# Altium PCB PET2001N_Keyboard.PcbDoc
Units mm, origin at the board's own origin, x right, y up, seen from the top; angles counter-clockwise.
Board outline 385.62 x 132.15 mm, 2 copper layers (Top Layer, Bottom Layer), stack 1.57 mm thick; 73 components, 18 nets, 184 pads, 0 vias.
Unrouted connection lines stored in the file: 148.
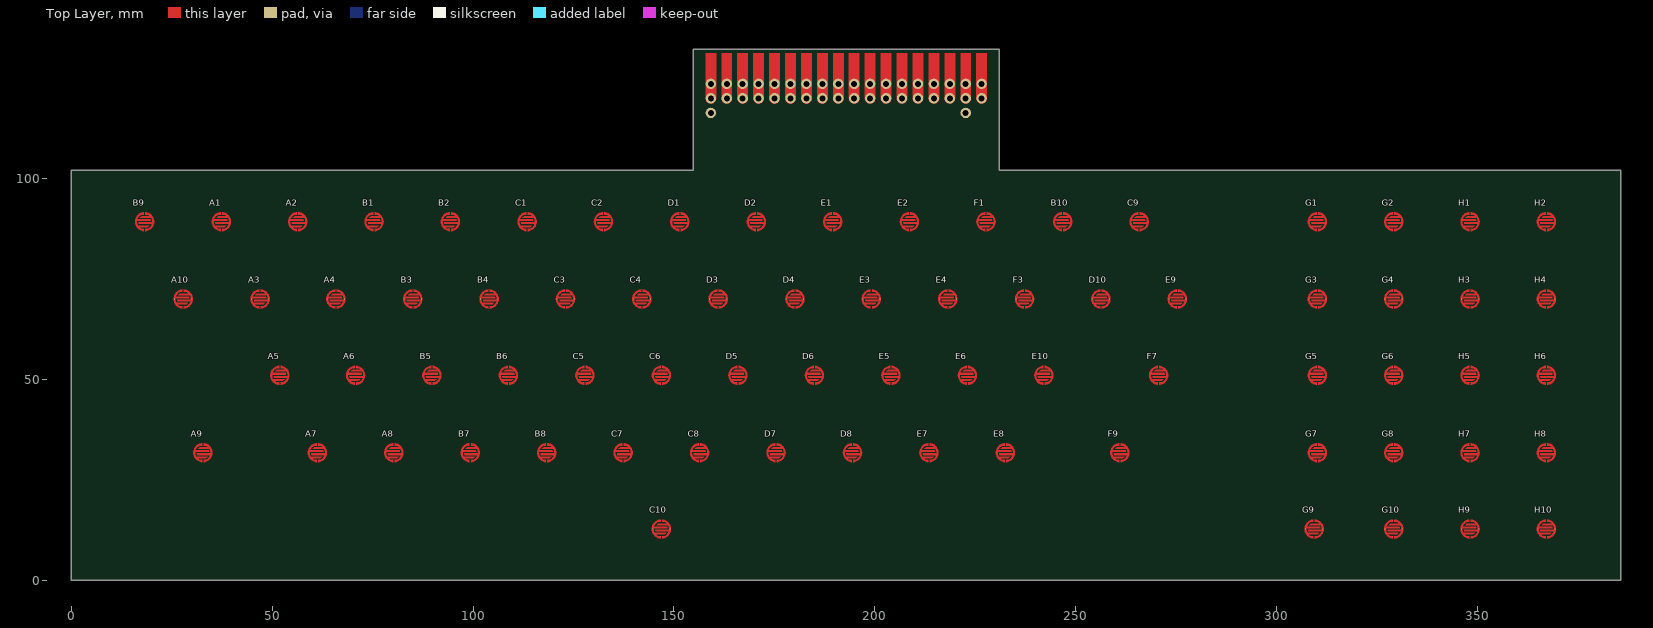
[diagram p0: Top Layer view]
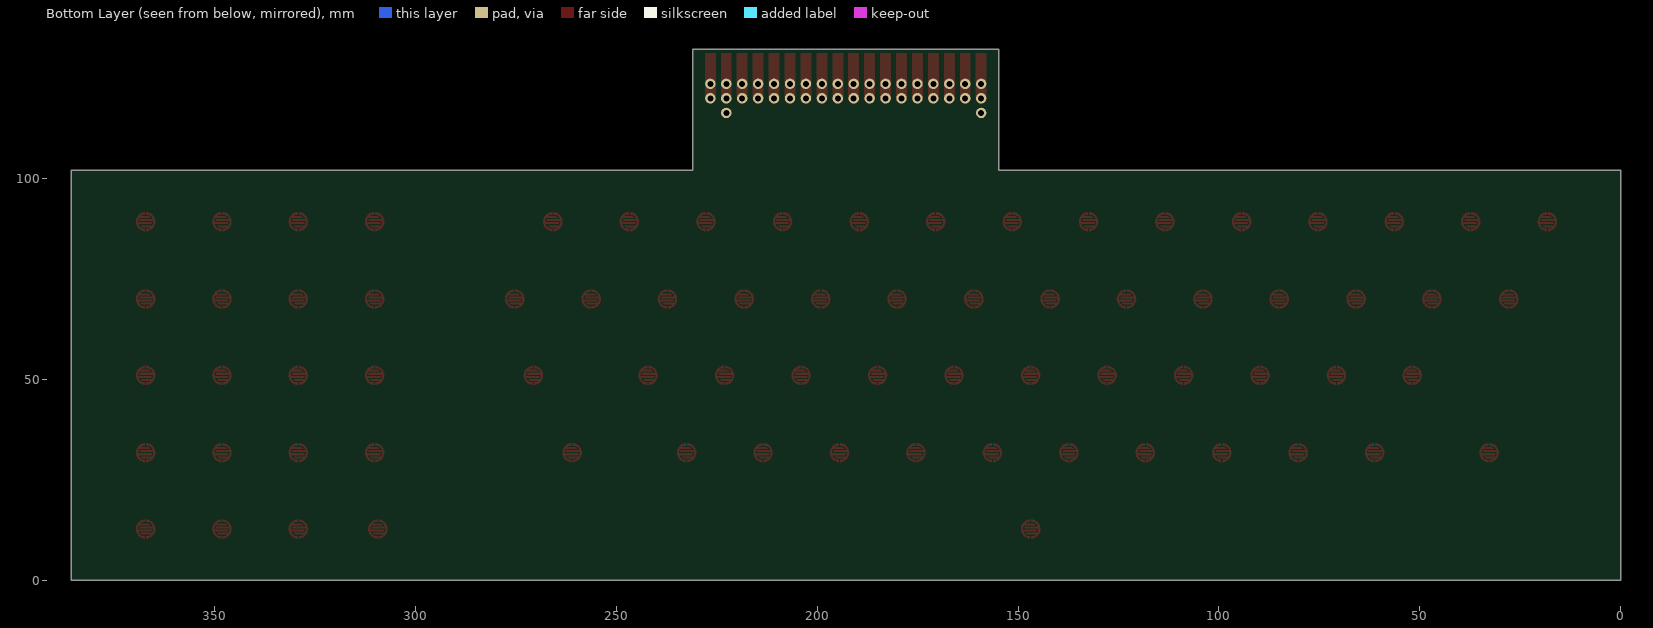
[diagram p1: Bottom Layer view, seen from below]

## Layer stack, top to bottom
Top Solder: solder mask 0.0127, Solder Resist, Dk 3.8
Top Layer: signal copper 0.035
Dielectric: core 1.5, FR-4, Dk 4.5
Bottom Layer: signal copper 0.035
Bottom Solder: solder mask 0.0127, Solder Resist, Dk 3.8

## Board outline
0,0 0,102 154.75,102 154.75,132.15 231,132.15 231,102 385.625,102 385.625,0

## Design rules (kind name [scope] priority, off if disabled: settings)
BoardOutlineClearance [All] p1: gap=0.2 ignorepadtopadclearanceinfootprint=FALSE
Clearance [All] p1: gap=0.127 ignorepadtopadclearanceinfootprint=FALSE except(0.25: Arc-Hole Track-Hole SMDPad-Hole THPad-Hole Via-Hole Fill-Hole Poly-Hole Region-Hole Text-Hole)
ComponentClearance [All] p1: gap=0.127 collisioncheckmode=3 verticalgap=0.127 showdistances=TRUE
DiffPairsRouting [All] p1: maxlimit=0.254 minlimit=0.127 mostfreqgap=0.127 toplayer_minwidth=0.127 toplayer_maxwidth=25.4 toplayer_prefwidth=0.127 bottomlayer_minwidth=0.127 bottomlayer_maxwidth=25.4 bottomlayer_prefwidth=0.127 maxuncoupledlength=12.7
Height [All] p1: minheight=0 maxheight=1816.048 prefheight=12.7
HoleSize [All] p1: absolutevalues=TRUE maxlimit=6.3 minlimit=0.3 maxpercent=80.000 minpercent=20.000
HoleToHoleClearance [All] p1: gap=0.25 allowstackedmicrovias=FALSE
MinimumAnnularRing [All] p1: minimumring=0.076
MinimumSolderMaskSliver [All] p1: minsoldermaskwidth=0
PlaneClearance [All] p1: clearance=0.127
PlaneConnect PlaneConnectPowerPads [InPadClass('PowerPads')] p1: planeconnectstyle=Direct reliefexpansion=0.508 reliefentries=4 reliefconductorwidth=0.254 reliefairgap=0.254
PlaneConnect [All] p2: pad.planeconnectstyle=Relief pad.reliefexpansion=0.3 pad.reliefentries=4 pad.reliefconductorwidth=0.127 pad.reliefairgap=0.127 via.planeconnectstyle=Direct via.reliefexpansion=0.3 via.reliefentries=4 via.reliefconductorwidth=0.127 via.reliefairgap=0.127
PolygonConnect PolygonConnectPowerPads [All vs (InPadClass('PowerPads'))] p1: connectstyle=Direct reliefconductorwidth=0.254 reliefentries=4 polygonreliefangle="90 Angle" airgapwidth=0.254
PolygonConnect [All] p2: thpad.connectstyle=Relief thpad.reliefconductorwidth=0.127 thpad.reliefentries=4 thpad.polygonreliefangle="90 Angle" thpad.airgapwidth=0.127 smdpad.connectstyle=Relief smdpad.reliefconductorwidth=0.127 smdpad.reliefentries=4 smdpad.polygonreliefangle="90 Angle" smdpad.airgapwidth=0.127 via.connectstyle=Direct via.reliefconductorwidth=0.127 via.reliefentries=4 via.polygonreliefangle="90 Angle" via.airgapwidth=0.127
RoutingVias [All] p1: holewidth=0.3 width=0.6 viastyle="Through Hole" minholewidth=0.3 minwidth=0.6 maxholewidth=0.6 maxwidth=6.6
SilkToSilkClearance [All] p1: silktosilkclearance=0
SilkToSolderMaskClearance [IsPad] p1: minsilkscreentomaskgap=0.127 clearancetoexposedcopper=TRUE
SolderMaskExpansion [All] p1: expansion=0.075 istentingtop=FALSE
Width [All] p1: maxlimit=25.4 minlimit=0.127 preferedwidth=0.127 minimp=50.000000 maximp=50.000000 favimp=50.000000
20 further rules are at their usual default settings.

## Components (designator, comment, footprint, x,y, rotation, side; value= is the part's Value field where it differs from the comment)
A1 "!" PET2001NKeyboardSoftButton 37.35,89.25 r0 top locked
A2 "\"" PET2001NKeyboardSoftButton 56.35,89.25 r0 top locked
A3 "Q" PET2001NKeyboardSoftButton 47,70 r0 top locked
A4 "W" PET2001NKeyboardSoftButton 65.85,70 r0 top locked
A5 "A" PET2001NKeyboardSoftButton 51.9,51 r0 top locked
A6 "S" PET2001NKeyboardSoftButton 70.75,51 r0 top
A7 "Z" PET2001NKeyboardSoftButton 61.25,31.75 r0 top
A8 "X" PET2001NKeyboardSoftButton 80.275,31.75 r0 top
A9 "SHIFTL" PET2001NKeyboardSoftButton 32.75,31.75 r0 top locked
A10 "OFF RVS" PET2001NKeyboardSoftButton 27.85,70 r0 top locked
B1 "#" PET2001NKeyboardSoftButton 75.35,89.25 r0 top locked
B2 "$" PET2001NKeyboardSoftButton 94.35,89.25 r0 top locked
B3 "E" PET2001NKeyboardSoftButton 85,70 r0 top
B4 "R" PET2001NKeyboardSoftButton 104,70 r0 top
B5 "D" PET2001NKeyboardSoftButton 89.75,51 r0 top
B6 "F" PET2001NKeyboardSoftButton 108.791,51 r0 top
B7 "C" PET2001NKeyboardSoftButton 99.3,31.75 r0 top
B8 "V" PET2001NKeyboardSoftButton 118.325,31.75 r0 top
B9 "@" PET2001NKeyboardSoftButton 18.25,89.25 r0 top locked
B10 "[" PET2001NKeyboardSoftButton 246.75,89.25 r0 top locked
C1 "%" PET2001NKeyboardSoftButton 113.45,89.25 r0 top locked
C2 "'" PET2001NKeyboardSoftButton 132.45,89.25 r0 top locked
C3 "T" PET2001NKeyboardSoftButton 123,70 r0 top
C4 "Y" PET2001NKeyboardSoftButton 142,70 r0 top
C5 "G" PET2001NKeyboardSoftButton 127.831,51 r0 top
C6 "H" PET2001NKeyboardSoftButton 146.872,51 r0 top
C7 "B" PET2001NKeyboardSoftButton 137.35,31.75 r0 top
C8 "N" PET2001NKeyboardSoftButton 156.375,31.75 r0 top
C9 "]" PET2001NKeyboardSoftButton 265.775,89.25 r0 top locked
C10 "SPACE" PET2001NKeyboardSoftButton 146.85,12.75 r0 top locked
D1 "&" PET2001NKeyboardSoftButton 151.45,89.25 r0 top locked
D2 "\" PET2001NKeyboardSoftButton 170.5,89.25 r0 top locked
D3 "U" PET2001NKeyboardSoftButton 161,70 r0 top
D4 "I" PET2001NKeyboardSoftButton 180.1,70 r0 top
D5 "J" PET2001NKeyboardSoftButton 165.913,51 r0 top
D6 "K" PET2001NKeyboardSoftButton 184.953,51 r0 top
D7 "M" PET2001NKeyboardSoftButton 175.4,31.75 r0 top
D8 "," PET2001NKeyboardSoftButton 194.425,31.75 r0 top
D10 "<" PET2001NKeyboardSoftButton 256.25,70 r0 top
E1 "(" PET2001NKeyboardSoftButton 189.5,89.25 r0 top locked
E2 ")" PET2001NKeyboardSoftButton 208.6,89.25 r0 top locked
E3 "O" PET2001NKeyboardSoftButton 199.1,70 r0 top
E4 "P" PET2001NKeyboardSoftButton 218.15,70 r0 top
E5 "L" PET2001NKeyboardSoftButton 203.994,51 r0 top
E6 ":" PET2001NKeyboardSoftButton 223.034,51 r0 top
E7 ";" PET2001NKeyboardSoftButton 213.45,31.75 r0 top
E8 "?" PET2001NKeyboardSoftButton 232.475,31.75 r0 top
E9 ">" PET2001NKeyboardSoftButton 275.275,70 r0 top
E10 "RUN STOP" PET2001NKeyboardSoftButton 242.075,51 r0 top
F1 "<-" PET2001NKeyboardSoftButton 227.65,89.25 r0 top locked
F3 "/\" PET2001NKeyboardSoftButton 237.25,70 r0 top
F7 "RETURN" PET2001NKeyboardSoftButton 270.625,51 r0 top
F9 "SHIFTR" PET2001NKeyboardSoftButton 260.975,31.75 r0 top
G1 "CLR HOME" PET2001NKeyboardSoftButton 310.125,89.25 r0 top locked
G2 "CRSR /\ \/" PET2001NKeyboardSoftButton 329.125,89.25 r0 top locked
G3 "7" PET2001NKeyboardSoftButton 310.125,70 r0 top locked
G4 "8" PET2001NKeyboardSoftButton 329.125,70 r0 top locked
G5 "4" PET2001NKeyboardSoftButton 310.125,51 r0 top locked
G6 "5" PET2001NKeyboardSoftButton 329.125,51 r0 top locked
G7 "1" PET2001NKeyboardSoftButton 310.125,31.75 r0 top locked
G8 "2" PET2001NKeyboardSoftButton 329.125,31.75 r0 top locked
G9 "0" PET2001NKeyboardSoftButton 309.325,12.75 r0 top locked
G10 "." PET2001NKeyboardSoftButton 329.125,12.75 r0 top locked
H1 "CRSR <>" PET2001NKeyboardSoftButton 348.125,89.25 r0 top locked
H2 "INST DEL" PET2001NKeyboardSoftButton 367.125,89.25 r0 top locked
H3 "9" PET2001NKeyboardSoftButton 348.125,70 r0 top locked
H4 "/" PET2001NKeyboardSoftButton 367.125,70 r0 top locked
H5 "6" PET2001NKeyboardSoftButton 348.125,51 r0 top locked
H6 "*" PET2001NKeyboardSoftButton 367.125,51 r0 top locked
H7 "3" PET2001NKeyboardSoftButton 348.125,31.75 r0 top locked
H8 "+" PET2001NKeyboardSoftButton 367.125,31.75 r0 top locked
H9 "-" PET2001NKeyboardSoftButton 348.125,12.75 r0 top locked
H10 "" PET2001NKeyboardSoftButton 367.125,12.75 r0 top locked

## Footprints (in the part's own frame and the unit in brackets; to place one, negate y for a bottom-side part, rotate by r counter-clockwise, add the part's x,y. Pads: shape width x height; smd on the part's side, far side on the other; paste and mask are expansions set on the pad)
PET2001NKeyboardSoftButton [mm]
  round 0.1 smd: 1(-2.15,0) 2(2.15,0)
  Top Layer region: -1.425,-0.583 -1.489,-0.392 -1.527,-0.194 -1.527,-0.194 1.915,-0.194 1.881,0.409 1.662,0.972 1.662,0.972 -1.194,0.972 -0.977,1.191 -0.72,1.361 -0.72,1.361 1.361,1.361 1.099,1.581 0.802,1.75 0.802,1.75 0.193,1.75 0.193,2.367 1.297,1.99 2.088,1.131 2.375,0 2.088,-1.131 1.297,-1.99 0.193,-2.367 0.193,-2.367 0.193,-1.75 0.802,-1.75 1.442,-1.276 1.835,-0.583 1.835,-0.583
  Top Layer region: 1.425,0.583 1.489,0.392 1.527,0.194 1.527,0.194 -1.915,0.194 -1.881,-0.409 -1.662,-0.972 -1.662,-0.972 1.194,-0.972 0.977,-1.191 0.72,-1.361 0.72,-1.361 -1.361,-1.361 -1.099,-1.581 -0.802,-1.75 -0.802,-1.75 -0.193,-1.75 -0.193,-2.367 -1.297,-1.99 -2.088,-1.131 -2.375,0 -2.088,1.131 -1.297,1.99 -0.193,2.367 -0.193,2.367 -0.193,1.75 -0.802,1.75 -1.442,1.276 -1.835,0.583 -1.835,0.583

## Part data
A1 A2 A3 A4 A5 A6 A7 A8 A9 A10 B1 B2 B3 B4 B5 B6 B7 B8 B9 B10 C1 C2 C3 C4 C5 C6 C7 C8 C9 C10 D1 D2 D3 D4 D5 D6 D7 D8 D10 E1 E2 E3 E4 E5 E6 E7 E8 E9 E10 F1 F3 F7 F9 G1 G2 G3 G4 G5 G6 G7 G8 G9 G10 H1 H2 H3 H4 H5 H6 H7 H8 H9 H10: library part PET2001NKeyboardSoftButton

## Free pads (board coordinates)
  round 2.6 hole 1.5: 4(159.175,119.951) 4(163.139,119.951) 4(167.104,119.951) 4(171.069,119.951) 4(175.034,119.951) 4(178.998,119.951) 4(182.963,119.951) 4(186.928,119.951) 4(190.892,119.951) 4(194.857,119.951) 4(198.822,119.951) 4(202.787,119.951) 4(206.751,119.951) 4(210.716,119.951) 4(214.681,119.951) 4(218.645,119.951) 4(222.61,119.951) 4(226.575,119.951) 5(159.175,123.551) 5(163.139,123.551) 5(167.104,123.551) 5(171.069,123.551) 5(175.034,123.551) 5(178.998,123.551) 5(182.963,123.551) 5(186.928,123.551) 5(190.892,123.551) 5(194.857,123.551) 5(198.822,123.551) 5(202.787,123.551) 5(206.751,123.551) 5(210.716,123.551) 5(214.681,123.551) 5(218.645,123.551) 5(222.61,123.551) 5(226.575,123.551)
  round 2.6 hole 1.5 mask+1: 4(159.175,116.3) 4(222.61,116.3)

## Nets (pads, with @x,y where several pads share a name; then routed paths per layer and width w, separated by ;. In a path a pad name is that pad's centre, name@x,y a point inside that pad or via, vN(x,y) a via of type N, cw(c..) or ccw(c..) an arc to the next point about the centre after c; other vN are vias at no path point)
1: A1.2 B1.2 C1.2 D1.2 E1.2 F1.2 G1.2 H1.2 pad.4@190.892,119.951 pad.5@190.892,123.551
2: A2.2 B2.2 C2.2 D2.2 E2.2 G2.2 H2.2 pad.4@194.857,119.951 pad.5@194.857,123.551
3: A3.2 B3.2 C3.2 D3.2 E3.2 F3.2 G3.2 H3.2 pad.4@198.822,119.951 pad.5@198.822,123.551
4: A4.2 B4.2 C4.2 D4.2 E4.2 G4.2 H4.2 pad.4@202.787,119.951 pad.5@202.787,123.551
5: A5.2 B5.2 C5.2 D5.2 E5.2 G5.2 H5.2 pad.4@206.751,119.951 pad.5@206.751,123.551
6: A6.2 B6.2 C6.2 D6.2 E6.2 G6.2 H6.2 pad.4@210.716,119.951 pad.5@210.716,123.551
7: A7.2 B7.2 C7.2 D7.2 E7.2 F7.2 G7.2 H7.2 pad.4@214.681,119.951 pad.5@214.681,123.551
8: A8.2 B8.2 C8.2 D8.2 E8.2 G8.2 H8.2 pad.4@218.645,119.951 pad.5@218.645,123.551
9: A9.2 B9.2 C9.2 E9.2 F9.2 G9.2 H9.2 pad.4@222.61,116.3 pad.4@222.61,119.951 pad.5@222.61,123.551
10: A10.2 B10.2 C10.2 D10.2 E10.2 G10.2 H10.2 pad.4@226.575,119.951 pad.5@226.575,123.551
A: A1.1 A2.1 A3.1 A4.1 A5.1 A6.1 A7.1 A8.1 A9.1 A10.1 pad.4@159.175,116.3 pad.4@159.175,119.951 pad.5@159.175,123.551
B: B1.1 B2.1 B3.1 B4.1 B5.1 B6.1 B7.1 B8.1 B9.1 B10.1 pad.4@163.139,119.951 pad.5@163.139,123.551
C: C1.1 C2.1 C3.1 C4.1 C5.1 C6.1 C7.1 C8.1 C9.1 C10.1 pad.4@167.104,119.951 pad.5@167.104,123.551
D: D1.1 D2.1 D3.1 D4.1 D5.1 D6.1 D7.1 D8.1 D10.1 pad.4@171.069,119.951 pad.5@171.069,123.551
E: E1.1 E2.1 E3.1 E4.1 E5.1 E6.1 E7.1 E8.1 E9.1 E10.1 pad.4@175.034,119.951 pad.5@175.034,123.551
F: F1.1 F3.1 F7.1 F9.1 pad.4@178.998,119.951 pad.5@178.998,123.551
G: G1.1 G2.1 G3.1 G4.1 G5.1 G6.1 G7.1 G8.1 G9.1 G10.1 pad.4@182.963,119.951 pad.5@182.963,123.551
H: H1.1 H2.1 H3.1 H4.1 H5.1 H6.1 H7.1 H8.1 H9.1 H10.1 pad.4@186.928,119.951 pad.5@186.928,123.551

## Other copper
Top Layer:
  region net A: 157.875,131.151 157.875,119.951 ccw(c159.175,119.951) 159.175,118.651 ccw(c159.175,119.951) 160.475,119.951 160.475,131.151
  region net 10: 225.275,131.151 225.275,119.951 ccw(c226.575,119.951) 226.575,118.651 ccw(c226.575,119.951) 227.875,119.951 227.875,131.151
  region net 8: 217.345,131.151 217.345,119.951 ccw(c218.645,119.951) 218.645,118.651 ccw(c218.645,119.951) 219.945,119.951 219.945,131.151
  region net 9: 221.31,131.151 221.31,119.951 ccw(c222.61,119.951) 222.61,118.651 ccw(c222.61,119.951) 223.91,119.951 223.91,131.151
  region net 7: 213.381,131.151 213.381,119.951 ccw(c214.681,119.951) 214.681,118.651 ccw(c214.681,119.951) 215.981,119.951 215.981,131.151
  region net 6: 209.416,131.151 209.416,119.951 ccw(c210.716,119.951) 210.716,118.651 ccw(c210.716,119.951) 212.016,119.951 212.016,131.151
  region net 5: 205.451,131.151 205.451,119.951 ccw(c206.751,119.951) 206.751,118.651 ccw(c206.751,119.951) 208.051,119.951 208.051,131.151
  region net 4: 201.487,131.151 201.487,119.951 ccw(c202.787,119.951) 202.787,118.651 ccw(c202.787,119.951) 204.087,119.951 204.087,131.151
  region net 3: 197.522,131.151 197.522,119.951 ccw(c198.822,119.951) 198.822,118.651 ccw(c198.822,119.951) 200.122,119.951 200.122,131.151
  region net E: 173.734,131.151 173.734,119.951 ccw(c175.034,119.951) 175.034,118.651 ccw(c175.034,119.951) 176.334,119.951 176.334,131.151
  region net F: 177.698,131.151 177.698,119.951 ccw(c178.998,119.951) 178.998,118.651 ccw(c178.998,119.951) 180.298,119.951 180.298,131.151
  region net D: 169.769,131.151 169.769,119.951 ccw(c171.069,119.951) 171.069,118.651 ccw(c171.069,119.951) 172.369,119.951 172.369,131.151
  region net 2: 193.557,131.151 193.557,119.951 ccw(c194.857,119.951) 194.857,118.651 ccw(c194.857,119.951) 196.157,119.951 196.157,131.151
  region net H: 185.628,131.151 185.628,119.951 ccw(c186.928,119.951) 186.928,118.651 ccw(c186.928,119.951) 188.228,119.951 188.228,131.151
  region net 1: 189.592,131.151 189.592,119.951 ccw(c190.892,119.951) 190.892,118.651 ccw(c190.892,119.951) 192.192,119.951 192.192,131.151
  region net G: 181.663,131.151 181.663,119.951 ccw(c182.963,119.951) 182.963,118.651 ccw(c182.963,119.951) 184.263,119.951 184.263,131.151
  region net C: 165.804,131.151 165.804,119.951 ccw(c167.104,119.951) 167.104,118.651 ccw(c167.104,119.951) 168.404,119.951 168.404,131.151
  region net B: 161.839,131.151 161.839,119.951 ccw(c163.139,119.951) 163.139,118.651 ccw(c163.139,119.951) 164.439,119.951 164.439,131.151

## Silkscreen, mask and mechanical layers (free items; w line width, h text height)
Top Solder:
  region: 157.875,131.151 157.875,119.951 ccw(c159.175,119.951) 159.175,118.651 ccw(c159.175,119.951) 160.475,119.951 160.475,131.151
  region: 225.275,131.151 225.275,119.951 ccw(c226.575,119.951) 226.575,118.651 ccw(c226.575,119.951) 227.875,119.951 227.875,131.151
  region: 217.345,131.151 217.345,119.951 ccw(c218.645,119.951) 218.645,118.651 ccw(c218.645,119.951) 219.945,119.951 219.945,131.151
  region: 221.31,131.151 221.31,119.951 ccw(c222.61,119.951) 222.61,118.651 ccw(c222.61,119.951) 223.91,119.951 223.91,131.151
  region: 213.381,131.151 213.381,119.951 ccw(c214.681,119.951) 214.681,118.651 ccw(c214.681,119.951) 215.981,119.951 215.981,131.151
  region: 209.416,131.151 209.416,119.951 ccw(c210.716,119.951) 210.716,118.651 ccw(c210.716,119.951) 212.016,119.951 212.016,131.151
  region: 205.451,131.151 205.451,119.951 ccw(c206.751,119.951) 206.751,118.651 ccw(c206.751,119.951) 208.051,119.951 208.051,131.151
  region: 201.487,131.151 201.487,119.951 ccw(c202.787,119.951) 202.787,118.651 ccw(c202.787,119.951) 204.087,119.951 204.087,131.151
  region: 197.522,131.151 197.522,119.951 ccw(c198.822,119.951) 198.822,118.651 ccw(c198.822,119.951) 200.122,119.951 200.122,131.151
  region: 173.734,131.151 173.734,119.951 ccw(c175.034,119.951) 175.034,118.651 ccw(c175.034,119.951) 176.334,119.951 176.334,131.151
  region: 177.698,131.151 177.698,119.951 ccw(c178.998,119.951) 178.998,118.651 ccw(c178.998,119.951) 180.298,119.951 180.298,131.151
  region: 169.769,131.151 169.769,119.951 ccw(c171.069,119.951) 171.069,118.651 ccw(c171.069,119.951) 172.369,119.951 172.369,131.151
  region: 193.557,131.151 193.557,119.951 ccw(c194.857,119.951) 194.857,118.651 ccw(c194.857,119.951) 196.157,119.951 196.157,131.151
  region: 185.628,131.151 185.628,119.951 ccw(c186.928,119.951) 186.928,118.651 ccw(c186.928,119.951) 188.228,119.951 188.228,131.151
  region: 189.592,131.151 189.592,119.951 ccw(c190.892,119.951) 190.892,118.651 ccw(c190.892,119.951) 192.192,119.951 192.192,131.151
  region: 181.663,131.151 181.663,119.951 ccw(c182.963,119.951) 182.963,118.651 ccw(c182.963,119.951) 184.263,119.951 184.263,131.151
  region: 165.804,131.151 165.804,119.951 ccw(c167.104,119.951) 167.104,118.651 ccw(c167.104,119.951) 168.404,119.951 168.404,131.151
  region: 161.839,131.151 161.839,119.951 ccw(c163.139,119.951) 163.139,118.651 ccw(c163.139,119.951) 164.439,119.951 164.439,131.151
  region: 156.875,120.15 ccw(c159.375,120.15) 159.375,117.65 226.375,117.65 ccw(c226.375,120.15) 228.875,120.15 228.875,132.15 156.875,132.15
  lines w0.025: 156.875,120.15 ccw(c159.375,120.15) 159.375,117.65 192.875,117.65 226.375,117.65 ccw(c226.375,120.15) 228.875,120.15 228.875,132.15 156.875,132.15 156.875,120.15
Mechanical 1:
  lines w0.025: 0,31.75 385.625,31.75 385.625,102 ; 18.25,0 18.25,102 0,102 ; 65.85,0 65.85,102 56.35,102 56.35,0 47,0 47,102 37.35,102 37.35,0 32.75,0 32.75,102 27.85,102 27.85,0 0,0 ; 385.625,12.75 13.8,12.75 0,12.75 0,102 ; 385.625,51 0,51 0,102 ; 385.625,70 0,70 0,102 ; 385.625,89.25 0,89.25 0,102 ; 0,0 385.625,0 385.625,102 ; 0,0 0,102 ; 0,102 154.75,102 154.75,132.15 231,132.15 231,102 385.625,102